# EAGLE board team13_4_old (EAGLE 8.6.0)
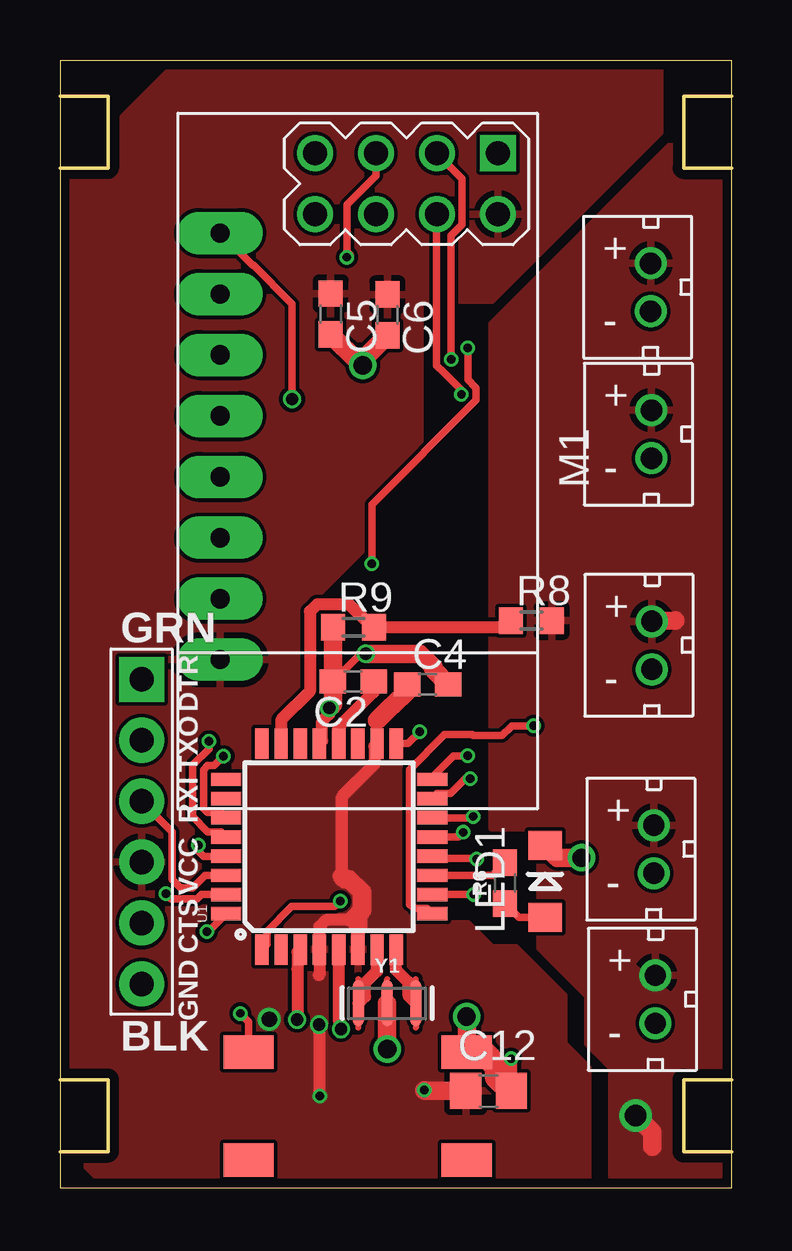
[diagram p0: board, top side]
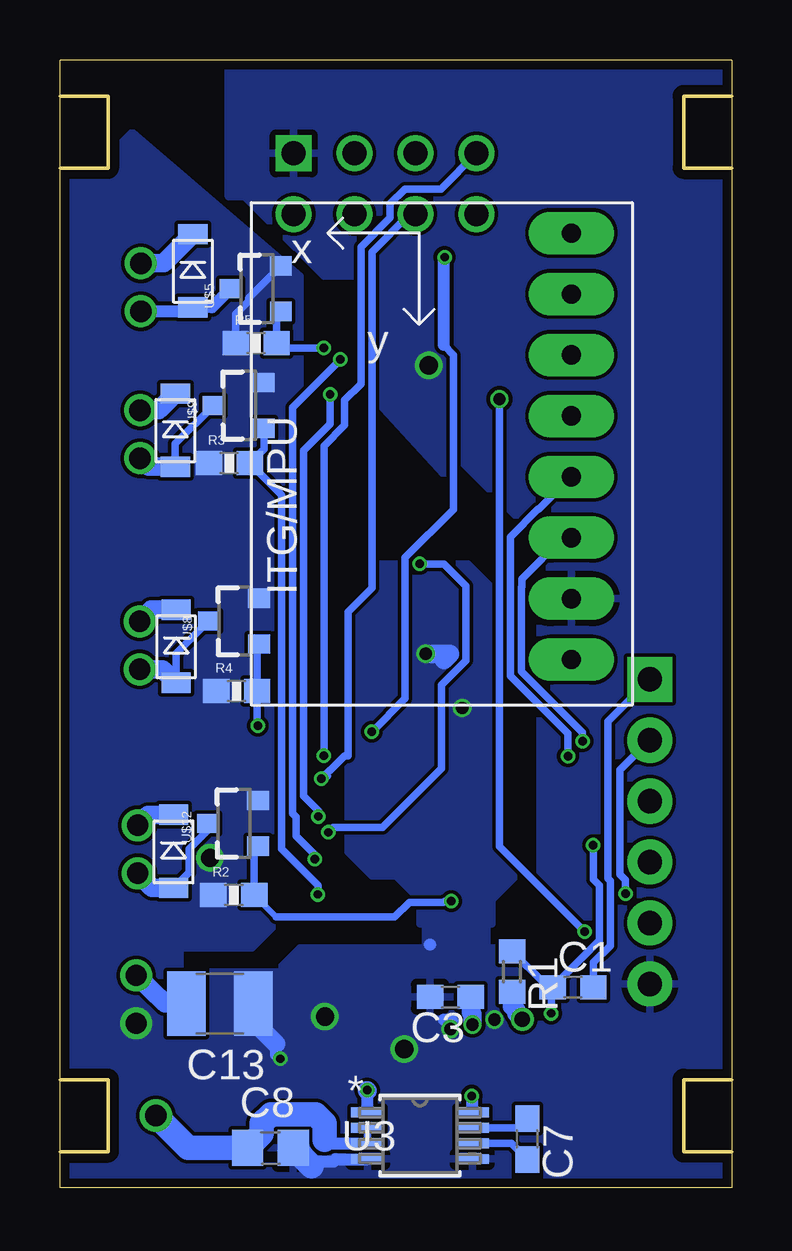
[diagram p1: board, bottom side, seen from below]

Size 28 x 47 mm. Coordinates in mm from the lower left corner, seen from the top.
Outline: 28,1.5 28,0 0,0 0,1.5
Outline: 28,1.5 28,4.5
Outline: 28,4.5 28,42.5
Outline: 28,42.5 28,45.5
Outline: 28,45.5 28,47 0,47 0,45.5
Outline: 0,45.5 0,42.5
Outline: 0,42.5 0,4.5
Outline: 0,4.5 0,1.5
Outline: 28,45.5 26,45.5 26,42.5 28,42.5
Outline: 28,1.5 26,1.5 26,4.5 28,4.5
Outline: 0,1.5 2,1.5 2,4.5 0,4.5
Outline: 0,45.5 2,45.5 2,42.5 0,42.5
Copper layers (1*16): Top 0.035559375mm / dielectric 1.6mm / Bottom 0.035559375mm
Design rules "oshpark-2layer": minimum track width 6mil, minimum drill 10mil, track to track 6mil, track to pad 6mil, pad to pad 6mil, via to via 6mil, smd to smd 6mil, copper to edge 15mil, drill to drill 6mil, minimum pad ring 5mil, minimum via ring 5mil, stop-mask expansion 2.5mil, vias tented up to drill 0mil, thermal gap 10mil

## Footprints (pad centres in the part's own frame; a part is rotated, then mirrored left to right if it is on the bottom)
C0603 = smd 1.1 x 1: 1 -0.85,0; 2 0.85,0
C0805 = smd 1.3 x 1.5: 1 -0.95,0; 2 0.95,0
C1210 = smd 1.6 x 2.7: 1 -1.4,0; 2 1.4,0
FTDI_DEVICE_SIDE = drill 1.016 pad 1.88 square: P$1 -6.35,0 | drill 1.016 pad 1.88: P$2 -3.81,0; P$3 -1.27,0; P$4 1.27,0; P$5 3.81,0; P$6 6.35,0
LED-1206 = smd 1.2 x 1.4: A -1.5,0; C 1.5,0
WIRELESS-NRF24L01 = drill 1 square: 1 -12.7,6.35 | drill 1: 2 -10.16,6.35; 3 -12.7,3.81; 4 -10.16,3.81; 5 -12.7,1.27; 6 -10.16,1.27; 7 -12.7,-1.27; 8 -10.16,-1.27
R0603 = smd 1 x 1.1: 1 -0.85,0; 2 0.85,0
0603-RES = smd 1.1 x 1: 1 -0.85,0; 2 0.85,0
0603 = smd 1.1 x 1: 1 -0.85,0; 2 0.85,0
TQFP32-08 = smd 1.27 x 0.559: 1 -4.293,2.8; 2 -4.293,2; 3 -4.293,1.2; 4 -4.293,0.4; 5 -4.293,-0.4; 6 -4.293,-1.2; 7 -4.293,-2; 8 -4.293,-2.8; 17 4.293,-2.8; 18 4.293,-2; 19 4.293,-1.2; 20 4.293,-0.4; 21 4.293,0.4; 22 4.293,1.2; 23 4.293,2; 24 4.293,2.8 | smd 0.559 x 1.27: 9 -2.8,-4.293; 10 -2,-4.293; 11 -1.2,-4.293; 12 -0.4,-4.293; 13 0.4,-4.293; 14 1.2,-4.293; 15 2,-4.293; 16 2.8,-4.293; 25 2.8,4.293; 26 2,4.293; 27 1.2,4.293; 28 0.4,4.293; 29 -0.4,4.293; 30 -1.2,4.293; 31 -2,4.293; 32 -2.8,4.293
GY-521 = drill 0.8 pad 1.778 long: ADO -8.89,-6.35; GND -8.89,6.35; INT -8.89,-8.89; SCL -8.89,3.81; SDA -8.89,1.27; VCC -8.89,8.89; XCL -8.89,-3.81; XDA -8.89,-1.27
21-0036K = smd 1.372 x 0.406: 1 -2.184,0.975; 2 -2.184,0.325; 3 -2.184,-0.325; 4 -2.184,-0.975; 5 2.184,-0.975; 6 2.184,-0.325; 7 2.184,0.325; 8 2.184,0.975
LL3301NF065QG = smd 2.1 x 1.4: 1 0,0; 2 0,-4.5; 3 9.1,0; 4 9.1,-4.5
JST_CONNECTOR_FEMALE = drill 0.889: + 0,1; - 0,-1
MINI2-F3-B = smd 1.22 x 0.85: NEG 0,1.55; POS 0,-1.5
SOT23-3 = smd 0.8 x 0.9: 1 -0.95,-1; 2 0.95,-1; 3 0,1.1
RESONATOR-SMD-3.2X1.3 = smd 0.45 x 1.905: 1 -1.2,0; 2 0,0; 3 1.2,0

## Placement (x,y rotation side)
C1  100nF  [C0603]  6.61,8.35 0 bottom
C2  100nF  [C0603]  12.22,21.1 180 top
C3  100nF  [C0603]  11.72,7.95 180 bottom
C4  100nF  [C0603]  15.33,20.97 0 top
C5  100nF  [C0603]  11.29,36.41 270 top
C6  10uF  [C0603]  13.65,36.38 270 top
C7  0.22uF  [C0603]  8.52,2.02 270 bottom
C8  1uF  [C0805]  19.23,1.65 0 bottom
C12  1uF  [C0805]  17.87,4.03 0 top
C13  100uF  [C1210]  21.33,7.67 180 bottom
J1  FTDI_DEVICE  [FTDI_DEVICE_SIDE]  3.4,14.84 270 top
LED1  [LED-1206]  20.23,12.76 90 top
M1  WIRELESS-NRF24L01  [WIRELESS-NRF24L01]  11.9,30.41 270 top
R1  10k  [R0603]  9.15,9 270 bottom
R2  10k  [0603-RES]  20.75,12.19 0 bottom
R3  10k  [0603-RES]  20.94,30.19 0 bottom
R4  10k  [0603-RES]  20.63,20.69 0 bottom
R5  10k  [0603-RES]  19.82,35.19 0 bottom
R6  220  [0603]  18.56,12.69 90 top
R8  10k  [R0603]  19.66,23.63 0 top
R9  10k  [R0603]  12.24,23.36 0 top
U1  ATMEGA328P_TQFP  [TQFP32-08]  11.22,14.21 90 top
U2  GY-521MPU6050  [GY-521]  15.57,30.89 180 bottom
U3  MAX1595EUA33+  [21-0036K]  12.99,2.17 0 bottom
U$1  LL3301NF065QG  [LL3301NF065QG]  7.87,5.65 0 top
U$3  JST_CONNECTOR_FEMALE  [JST_CONNECTOR_FEMALE]  24.66,31.4 0 top
U$4  DB2W40300L  [MINI2-F3-B]  23.19,31.55 0 bottom
U$5  N-CHANNEL-MOSFET-IRLML6244TRPBF  [SOT23-3]  19.79,37.47 90 bottom
U$6  DB2W40300L  [MINI2-F3-B]  23.27,13.99 0 bottom
U$7  JST_CONNECTOR_FEMALE  [JST_CONNECTOR_FEMALE]  24.76,14.1 0 top
U$8  N-CHANNEL-MOSFET-IRLML6244TRPBF  [SOT23-3]  20.7,23.61 90 bottom
U$9  N-CHANNEL-MOSFET-IRLML6244TRPBF  [SOT23-3]  20.5,32.6 90 bottom
U$10  DB2W40300L  [MINI2-F3-B]  23.16,22.54 0 bottom
U$11  JST_CONNECTOR_FEMALE  [JST_CONNECTOR_FEMALE]  24.68,22.6 0 top
U$12  N-CHANNEL-MOSFET-IRLML6244TRPBF  [SOT23-3]  20.74,15.18 90 bottom
U$14  DB2W40300L  [MINI2-F3-B]  22.46,38.19 0 bottom
U$15  JST_CONNECTOR_FEMALE  [JST_CONNECTOR_FEMALE]  24.63,37.52 0 top
U$19  JST_CONNECTOR_FEMALE  [JST_CONNECTOR_FEMALE]  24.82,7.84 0 top
Y1  8MHz  [RESONATOR-SMD-3.2X1.3]  13.64,7.68 0 top

## Library data of the parts
C1-C8 C12 C13 = rcl; SPICEPREFIX: C
J1 M1 U2 U$3 U$4 U$6 U$7 U$10 U$11 U$14 U$15 U$19 = quad
LED1 = LilyPad-Wearables
R1 R8 R9 = rcl; SPICEPREFIX: R
R2-R5 = SparkFun-Resistors
R6 = SparkFun-Resistors; PROD_ID: RES-07861
U1 = quad; PROD_ID: IC-09069
U3 = MAX1595EUA33+; MANUFACTURER_PART_NUMBER: MAX1595EUA33+; VENDOR: Maxim Integrated Products
U$1 = E-Switch
U$5 U$8 U$9 U$12 = quad; DATASHEET: http://www.mouser.com/ds/2/196/irlml6244pbf-936666.pdf; MOUSER: 942-IRLML6244TRPBF; URL: http://www.mouser.com/Search/ProductDetail.aspx?R=IRLML6244TRPBFvirtualkey57370000virtualkey942-IRLML6244TRPBF
Y1 = SparkFun-Clocks; PROD_ID: XTAL-08895

## Nets
AIN: R8.1 R9.2 U1.23
FTDI_DTR: C1.2 J1.P$1
FTDI_RX: J1.P$3 U1.30
FTDI_TX: J1.P$2 U1.31
GND: C2.2 C3.2 C4.2 C5.2 C6.2 C8.2 C12.2 C13.1 J1.P$6 LED1.C M1.1 R2.1 R3.1 R4.1 R5.1 R9.1 U1.3 U1.5 U1.21 U2.GND U3.4 U3.5 U$1.3 U$5.2 U$8.2 U$9.2 U$12.2 U$19.- Y1.2
IMU_INT: U1.32 U2.INT
IMU_SCL: U1.28 U2.SCL
IMU_SDA: U1.27 U2.SDA
N$1: C1.1 R1.1 U1.29 U$1.1
N$2: C2.1 U1.20
N$5: U$3.- U$4.POS U$9.3
N$6: C7.1 U3.7
N$7: R6.2 U1.11
N$9: U$6.POS U$7.- U$12.3
N$10: C7.2 U3.6
N$11: LED1.A R6.1
N$13: U$8.3 U$10.POS U$11.-
N$17: U$5.3 U$14.POS U$15.-
NRF_CE: M1.3 U1.12
NRF_CSN: M1.4 U1.14
NRF_MISO: M1.7 U1.16
NRF_MOSI: M1.6 U1.15
NRF_SCK: M1.5 U1.17
PWM1: R2.2 U1.1 U$12.1
PWM2: R3.2 U1.10 U$9.1
PWM3: R4.2 U1.9 U$8.1
PWM4: R5.2 U1.13 U$5.1
VCC: C3.1 C4.1 C5.1 C6.1 C12.1 J1.P$4 M1.2 R1.2 U1.4 U1.6 U1.18 U2.VCC U3.1 U3.8
VIN: C8.1 C13.2 R8.2 U3.2 U3.3 U$3.+ U$4.NEG U$6.NEG U$7.+ U$10.NEG U$11.+ U$14.NEG U$15.+ U$19.+
XTAL1: U1.7 Y1.1
XTAL2: U1.8 Y1.3

## Tracks (layer width: path | path; a pad name or v marks a point on that pad's centre or on a via)
AIN
  Top 0.508: U1.23 9.22,19.49 10.42,20.69 10.42,24.01 10.72,24.31 12.06,24.31 13.01,23.36 R9.2 18.53,23.36 R8.1
FTDI_DTR
  Bottom 0.305: C1.2 5.76,9.38 5.05,10.08 5.05,12.78 5.16,12.89 5.16,19.43 J1.P$1
FTDI_RX
  Top 0.305: J1.P$3 4.68,14.83 4.68,14 4.68,12.85 5.04,12.49 5.54,12.49 6.05,13.01 U1.30
FTDI_TX  (via drill 0.35)
  Top 0.305: U1.31 5.9,12.21 5.73,12.04 4.63,12.04 v4.42,12.24
  Bottom 0.305: v4.42,12.24 4.42,12.82 4.65,13.05 4.65,17.4 J1.P$2
GND  (via drill 0.35, 0.51, 0.76)
  Top 0.305: C2.2 12.53,22.25 v12.75,22.25
  Top 0.508: U1.21 10.93,18.62 10.93,19.44 11.23,19.73 v11.23,19.99 | U1.5 11.62,6.97 11.64,6.95 11.64,6.68 v11.71,6.61 | U1.3 9.91,9.8 9.91,9.11 9.9,9.11 9.9,6.95 9.89,6.96 v9.89,7 | C12.2 v18.82,5.36 v18.82,5.37
  Top 0.762: LED1.C 20.75,13.74 v21.74,13.74 | C4.2 15.56,21.59 15.56,21.69 15,22.25 v12.75,22.25 | v11.23,19.99 11.38,20.14 C2.2 11.38,23.34 R9.1 | C6.2 12.47,34.34 | 12.47,34.34 v12.63,34.27 | C5.2 12.47,34.38 12.47,34.34 | Y1.2 v13.64,5.78 | U$1.3 16.96,7.11 v16.95,7.12
  Top 1.016: C12.2 18.23,4.62 18.23,5.05 17.63,5.65 U$1.3
  Bottom 0.305: U$5.2 20.13,37.08 20.13,36.94 20.67,36.4 R5.1
  Bottom 0.508: 12.57,10.13 | 11.64,6.95 11.69,7 12,7 | v18.82,5.37 19,5.55 19,6 | 17.51,0.89 17.31,1.09 16.59,1.09 16.49,1.18 U3.4
  Bottom 0.762: 21.72,13.74 v21.74,13.74 | v12.75,22.25 11.75,22.25 12,22 | 19,6 19.93,6.93 C13.1
  Bottom 1.016: C8.2 18.27,1.65 17.51,0.89
  pour Bottom (no thermals): 28,10.5 28,43.5 27,44.5 18.5,37.5 20,36 20,34.5 18.5,33 18.5,29.5 20,28 20,26 18.5,24.5 18.5,20 19.5,19 19.5,17 18.5,16 18.5,11.5 20,10 27.5,10
  pour Bottom: 10.31,12.14 10.31,9.91 12.65,9.91 12.65,12.14 12.62,12.17 10.31,12.17
  pour Bottom: 11,1 23,1 24,2 24,7 23,8 22,9 14,9 13,10 8,10 7,11 7,30 15,38 15,46 4,46 3,45 3,43 2,42 1,41 1,6 2,5 3,4 3,2 4,1
  pour Bottom: 13,10 18,10 19,9 14,9
  pour Bottom: 9,10 8,11 8,27 12,31 12,35 9,35 6,38 2,38 2,10
  pour Bottom: 10,25 11,26 15,26 16,25 16,14 15,13 14,13 13,12 13,11 10,11 10,12 9,13 9,24
  pour Bottom: 15,45 13,47 0,47 0,7 3,4 5,4 6,5 6,38 7,39 14,39 15,40
  pour Bottom (no thermals): 23,5 26,5 28,7 28,10 23,10
  pour Bottom: 10,38 15,38 15,33 11.05,28.69 10,29
  pour Bottom (no thermals): 24,5 18,5 18,9 24,9
  pour Bottom: 28,9 28,0 22,0 22,9
  pour Bottom (no thermals): 19,37 18,38 25,44 26,43 26,37
  pour Bottom (no thermals): 18,38 18,12 20,10 23,10 23,38
  pour Bottom: 14,2 14,0.33 14.01,0.32 22.87,0.32 22.91,0.28 22.91,6.05 22.97,6.11 14.21,6.11 14.12,6.01 14.12,2.62 14.13,2.6 14.01,2.48 14.01,2.44 14,2.42
  pour Bottom: 24.25,41.76 27.69,41.76 27.69,34.57 17.37,34.57 17.16,34.36
  pour Bottom: 13.64,40.36 13.19,40.82 12,42.01 12,44 12,46
  pour Bottom: 28,35 11,35 10,36
  pour Bottom: 0,8 0,0 21,0 21,9 1,9
  pour Bottom: 12,47 21,47 21,41.34 20.97,41.31 20.31,41.31 20,41 17,38 11,38 11,47
IMU_INT  (via drill 0.35, 0.51)
  Top 0.305: 6.53,11.41 U1.32 6.18,10.66 v6.12,10.66 | U2.INT 8.03,38.44 8.06,38.44 9.68,36.83 v9.68,32.87
  Bottom 0.305: v6.12,10.66 9.68,14.22 9.68,28.3 v9.68,32.87
IMU_SCL  (via drill 0.35)
  Top 0.305: U1.28 6.71,14.83 6.17,14.83 5.53,15.46 5.53,17.61 6.21,18.29 v6.21,18.61
  Bottom 0.305: v6.21,18.61 6.21,18.96 8.76,21.51 8.76,25.04 8.75,25.05 8.75,25.38 7.04,27.09 U2.SCL
IMU_SDA  (via drill 0.35)
  Top 0.305: U1.27 6.71,15.63 6.17,15.63 5.99,15.8 5.99,17.42 6.17,17.59 6.43,17.59 v6.82,17.98
  Bottom 0.305: v6.82,17.98 6.82,18.92 9.22,21.32 9.22,27.12 8.06,28.28 8.03,28.28 U2.SDA
N$1  (via drill 0.35)
  Top 0.305: U1.29 6,13.81 5.77,14.04 v5.77,14.27 | U$1.1 7.87,6.92 v7.52,7.26
  Bottom 0.305: C1.1 5.54,10.27 5.51,10.27 5.51,12.59 5.77,12.85 v5.77,14.27 | C1.1 7.46,8.51 7.81,8.51 R1.1 | v7.52,7.26 7.52,8.29 C1.1
N$2
  Top 0.508: U1.20 11.62,19.19 13.07,20.65 C2.1
N$5
  Bottom 0.305: U$9.3 23.19,31.01 U$4.POS
  Bottom 0.762: U$4.POS 24.3,30.05 U$3.-
N$6
  Bottom 0.305: U3.7 8.9,2.49 C7.1
N$7
  Top 0.305: U1.11 18.03,13.01 R6.2
N$9
  Bottom 0.305: U$12.3 21.84,14.88 22.62,14.1 22.62,13.14 U$6.POS
  Bottom 0.762: U$6.POS 24.15,12.49 U$7.-
N$10
  Bottom 0.305: U3.6 9.19,1.84 C7.2
N$11
  Top 0.305: LED1.A 19.14,11.26 R6.1
N$13
  Bottom 0.305: U$10.POS 23.16,22.25 U$8.3
  Bottom 0.762: U$10.POS 23.71,21.6 U$11.-
N$17
  Bottom 0.508: U$15.- 22.62,36.52 U$14.POS 21.66,36.69 U$5.3
NRF_CE  (via drill 0.35)
  Top 0.305: U1.12 15.61,13.72 17.35,13.72 v17.37,13.69 | v16.31,34.52 16.31,39.67 16.77,40.13 16.77,42.05 M1.3
  Bottom 0.305: v17.37,13.69 17.37,13.87 18.16,14.66 18.16,15.44 18.31,15.59 18.31,32.52 v16.31,34.52
NRF_CSN  (via drill 0.35)
  Top 0.305: 16.76,33.1 v16.74,33.07 16.74,33.23 15.98,33.98 15.7,34.27 15.7,40.52 15.71,40.53 M1.4 | v17.22,15.47 17.16,15.41 U1.14
  Bottom 0.305: v16.74,33.07 16.74,31.82 17.85,30.71 17.85,16.33 17.22,15.7 v17.22,15.47
NRF_MISO  (via drill 0.35)
  Top 0.305: U1.16 15.47,17.05 16.41,18 v17,18
  Bottom 0.305: v17,18 17,30.92 16.13,31.78 16.13,32.82 15.46,33.49 15.46,39.19 14.23,40.42 14.23,41.01 13.62,41.62 | 13.62,41.62 13.61,41.62 12.12,41.62 M1.7 | 13.62,41.62
NRF_MOSI  (via drill 0.35)
  Top 0.305: U1.15 15.73,16.43 16.27,16.43 16.9,17.05 v17.1,17.05
  Bottom 0.305: 16.85,17.15 17,17.15 v17.1,17.05 16.76,17.39 16.75,17.39 16.14,18 16,18 16,24 15,25 15,39 13.43,40.57 M1.6
NRF_SCK  (via drill 0.35)
  Top 0.305: v15,19 14.5,18.5 U1.17 | v11.96,38.78 11.96,40.97 13.18,42.17 M1.5
  Top 0.508: v11.96,38.78 12.02,38.83
  Bottom 0.305: 12,35.12 11.59,34.71 11.59,28.27 13.61,26.25 13.61,20.39 v15,19
  Bottom 0.508: 12,35.12 12,38.74 v11.96,38.78
PWM1  (via drill 0.35)
  Top 0.305: U1.1 8.64,10.13 8.64,10.68 9.67,11.71 11.46,11.71 v11.68,11.94
  Bottom 0.254: R2.2 18.99,11.28
  Bottom 0.305: 18.99,11.28 14.05,11.28 13.44,11.89 12.01,11.89 11.97,11.94 v11.68,11.94 | U$12.1 19.9,14.07 R2.2
PWM2  (via drill 0.35)
  Top 0.305: U1.10 v17.24,12.21 v17.25,12.22 17.27,12.24
  Bottom 0.305: v17.25,12.22 17.25,12.6 18.77,14.12 18.77,28.87 R3.2 19.5,30.78 U$9.1
PWM3  (via drill 0.35)
  Top 0.305: U1.9 15.3,11.63 14.75,11.63 14.57,11.8 14.57,17.42 16.03,18.88 17.18,18.88 17.21,18.84 18.43,18.84 18.8,19.2 18.84,19.25 v19.75,19.25
  Bottom 0.305: U$8.1 19.78,22.28 R4.2 | R4.2 19.78,20.52 19.8,20.5 | v19.75,19.25 19.78,19.28 R4.2
PWM4  (via drill 0.35)
  Top 0.305: 15.56,14.56 U1.13 16.62,14.61 v16.82,14.8 | v13,26 13,28.47 17.34,32.82 17.34,33.32 17,33.67 v17,35
  Bottom 0.305: U$5.1 18.97,36.34 R5.2 18.78,35 v17,35 | v16.82,14.8 16.61,15.02 14.54,15.02 12.09,17.47 12.09,20.94 11.06,21.97 11.06,25.06 12,26 v13,26
VCC  (via drill 0.35, 0.51, 0.64)
  Top 0.508: 12.01,11.15 11.1,11.15 10.82,10.87 U1.4 10.82,8.87 10.8,8.85 | 12.01,11.15 12.09,11.15 12.42,10.82 U1.6 | 13.23,18.52 U1.18 | U1.18 13.11,18.39 13.11,17.64 11.76,16.3 11.76,12.97 12.47,12.26 12.47,11.61 12.01,11.15 | U1.18 13.22,19.47 13.22,19.48 | 10.83,6.77 v10.8,6.79 10.8,3.85 v10.83,3.82
  Top 0.762: 12.42,10.82 12.42,11.38 12.6,11.56 12.6,12.31 12.06,12.85 11.88,12.85 11.76,12.97 | 13.22,19.47 13.82,20.07 13.85,20.07 14.48,20.7 C4.1 | v15.19,4.05 15.22,4.03 C12.1
  Bottom 0.508: U3.8 10.81,3.68 v10.83,3.82 | U3.1 15.17,4.04
  Bottom 0.762: R1.2 9.15,7.56 8.97,7.38 8.97,7.26 v8.72,7.01 | C3.1 10.87,7.3 10.8,7.23 v10.8,6.79 | 15.17,4.04 v15.19,4.05
  pour Top: 12,17 11,17 10,16 10,13 11,12 12,12 13,13 13,16
  pour Top: 1,41 3,43 3,44 5,46 6,46 7,45 10,42 10,26 6,22 6,11 8,9 17,9 18,8 18,7 21,4 21,2 20,1 4,1 3,2 3,5 2,6 1,7
  pour Top: 16,8 16,18 7,18 7,8
  pour Top: 0,2 2,0 7,0 9,2 10,3 10,10 5,15 5,22 6,23 10,27 10,45 10,46 9,47 5,47 0,42
  pour Top: 9,40 13,36 13,31 9,27
  pour Top: 10,16 10,25 9,26 1,26 1,13 10,13
  pour Top: 21,3 21,6 21,8 19,10 18,10 17,11 8,11 8,3
  pour Top: 21,2 22,3 22,5 21,6 16,6 16,2
  pour Top: 10,38 15,38 15,29 9,23 9,38
  pour Top: 15,36 15,40 9,40 9,36
  pour Top: 9,40 18,40 20,42 20,47 9,47
  pour Top: 22,3 22,0 6,0 6,4 22,4
  pour Top: 16,46 21,46 21,41 20,41 19,40 11,40 11,46
  pour Top: 13,46 24,46 24,43 18,37 17,37 17,40 16,41 9,41 9,46
  pour Top: 18,47 25,47 25,44 18,37 11,37 11,47
VIN  (via drill 0.9)
  Top 0.762: 25.65,23.63 U$11.+ | 24.7,1.7 24.7,2.3 v24,3
  Bottom 0.305: U3.3 U3.2
  Bottom 0.508: 16.96,2 16.8,1.84 U3.3
  Bottom 0.762: U$10.NEG 24.19,24.09 U$11.+ | U$6.NEG 24.32,15.54 U$7.+ | U$19.+ 23.61,7.67 C13.2 | U$4.NEG 23.89,32.4 U$3.+ | U$15.+ 23.68,38.52 U$14.NEG
  Bottom 1.016: v24,3 22.65,1.65 C8.1 19.59,2.24 19.59,2.67 19.2,3.06 17.35,3.06 16.96,2.67 16.96,2
  pour Top (rank 2, no thermals): 22,6 22,10 19,13 28,6
  pour Top: 28,2 26,2 25,1 24,1 23,2 23,5 22,6 22,7
  pour Top: 23,2 23,0 28,0 28,10 22,10 22,6 23,5
  pour Top: 28,45 28,37 27,36
  pour Top: 18,36 18,25 18,15 20,15 20,10 21,9 22,8 23,8 26,8 28,6 28,44 26,44
XTAL1
  Top 0.508: Y1.1 12.73,7.97 12.73,8.54 13.22,9.03 U1.7
XTAL2
  Top 0.508: Y1.3 14.54,7.99 14.54,8.55 14.02,9.07 U1.8